# Altium PCB PCB1.PcbDoc (part 4 of 6)
Units mil, origin at the board's own origin, x right, y up, seen from the top; angles counter-clockwise.
Board outline 58000 x 19845 mil, 4 copper layers (Top Layer, MidLayer1, MidLayer2, Bottom Layer); 162 components, 222 nets, 4894 pads, 2245 vias.
Unrouted connection lines stored in the file: 192.
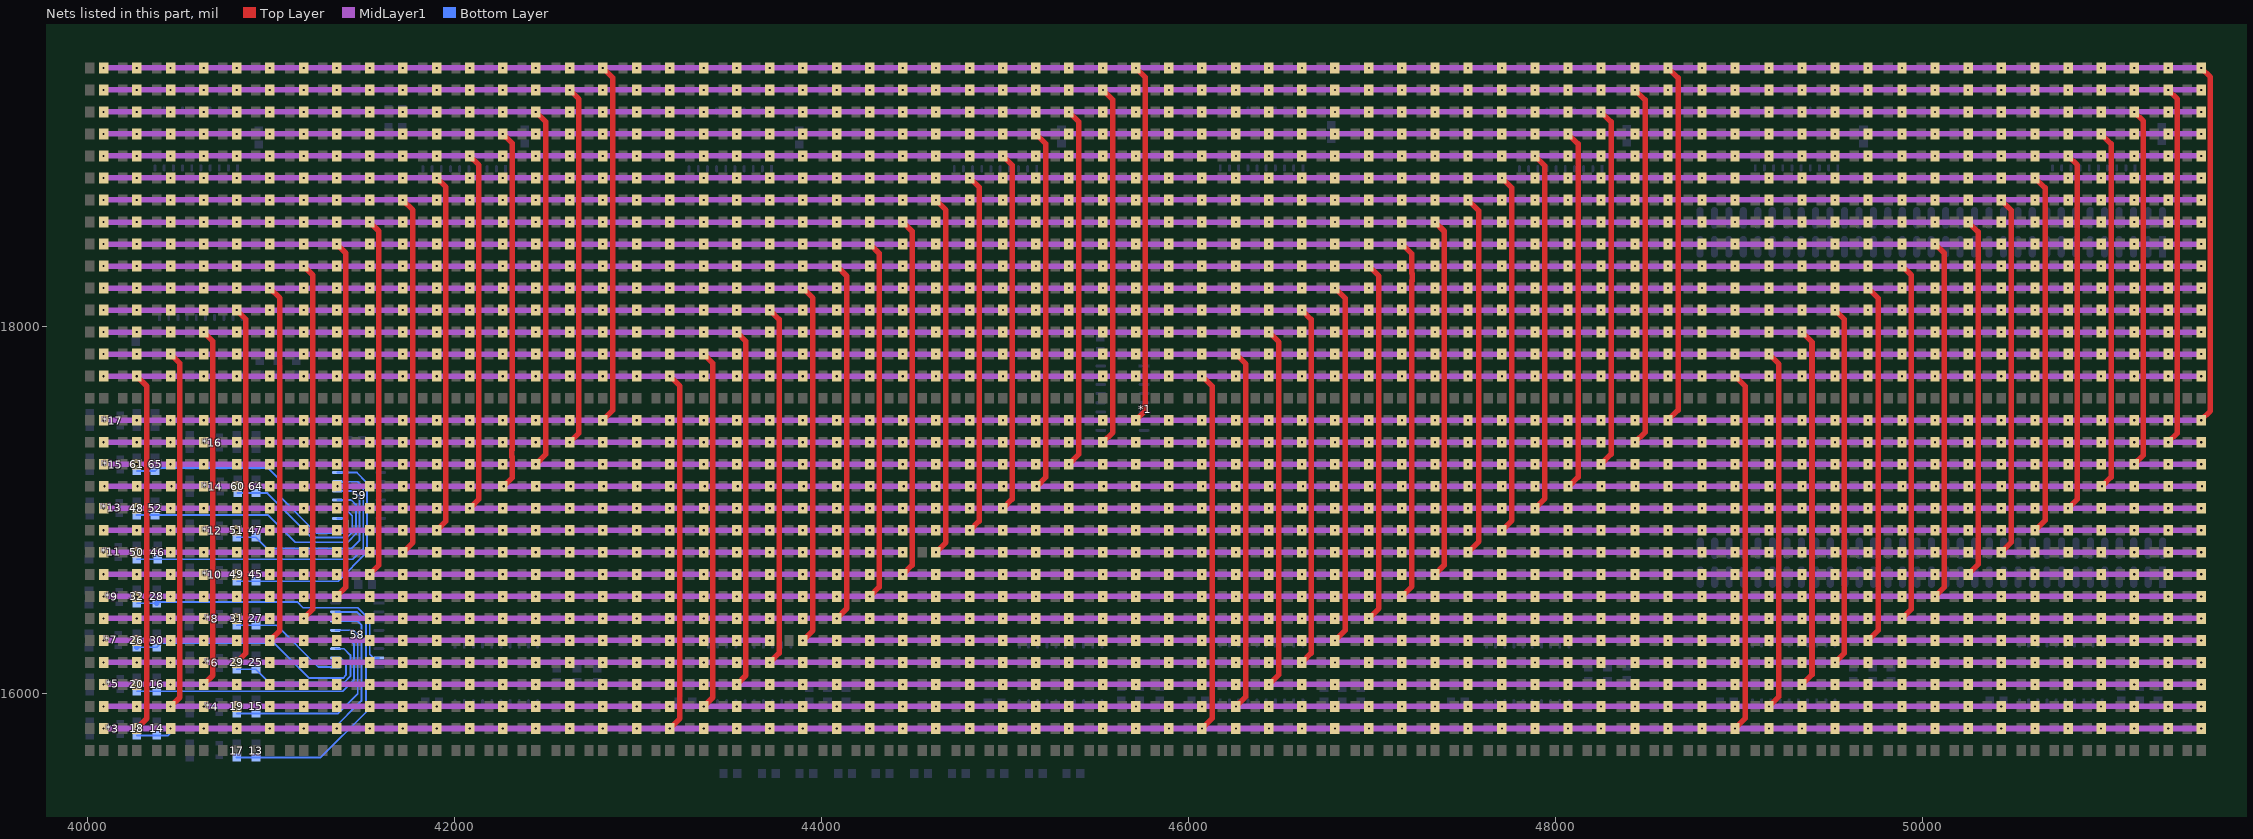
[diagram p6: the nets of this part, all layers, seen from the top]

## Via types
v1: diameter 20, hole 12, Top Layer to MidLayer1, 2032 vias
v2: diameter 20, hole 12, Top Layer to Bottom Layer, 143 vias
v3: diameter 20, hole 12, MidLayer2 to Bottom Layer, 70 vias

## Nets (pads, with @x,y where several pads share a name; then routed paths per layer and width w, separated by ;. In a path a pad name is that pad's centre, name@x,y a point inside that pad or via, vN(x,y) a via of type N, cw(c..) or ccw(c..) an arc to the next point about the centre after c; other vN are vias at no path point) (continued)
AOD1: *1.66 *3.1 | length 30722
  Top Layer w30: v1(40270.2,15810) 40325,15864.8 40325,17675.2 v1(40270.2,17730) ; v1(43175.2,15810) 43230,15864.8 43230,17675.2 v1(43175.2,17730) ; v1(46075.2,15810) 46130,15864.8 46130,17675.2 v1(46075.2,17730) ; v1(48980.2,15810) 49035,15864.8 49035,17675.2 v1(48980.2,17730)
  MidLayer1 w30: v2(40090,15810) v1(40270.2,15810) v1(40455.2,15810) v1(40635.2,15810) v1(40815,15810) v1(40995.2,15810) v1(41180.2,15810) v1(41360.2,15810) v1(41540,15810) v1(41720.2,15810) v1(41905.2,15810) v1(42085.2,15810) v1(42265,15810) v1(42445.2,15810) v1(42630.2,15810) v1(42810.2,15810) v1(42995,15810) v1(43175.2,15810) v1(43360.2,15810) v1(43540.2,15810) v1(43720,15810) v1(43900.2,15810) v1(44085.2,15810) v1(44265.2,15810) v1(44445,15810) v1(44625.2,15810) v1(44810.2,15810) v1(44990.2,15810) v1(45170,15810) v1(45350.2,15810) v1(45535.2,15810) v1(45715.2,15810) v1(45895,15810) v1(46075.2,15810) v1(46260.2,15810) v1(46440.2,15810) v1(46620,15810) v1(46800.2,15810) v1(46985.2,15810) v1(47165.2,15810) v1(47345,15810) v1(47525.2,15810) v1(47710.2,15810) v1(47890.2,15810) v1(48070,15810) v1(48250.2,15810) v1(48435.2,15810) v1(48615.2,15810) v1(48800,15810) v1(48980.2,15810) v1(49165.2,15810) v1(49345.2,15810) v1(49525,15810) v1(49705.2,15810) v1(49890.2,15810) v1(50070.2,15810) v1(50250,15810) v1(50430.2,15810) v1(50615.2,15810) v1(50795.2,15810) v1(50975,15810) v1(51155.2,15810) v1(51340.2,15810) v1(51520.2,15810) ; v1(40090,17730) v1(40270.2,17730) v1(40455.2,17730) v1(40635.2,17730) v1(40815,17730) v1(40995.2,17730) v1(41180.2,17730) v1(41360.2,17730) v1(41540,17730) v1(41720.2,17730) v1(41905.2,17730) v1(42085.2,17730) v1(42265,17730) v1(42445.2,17730) v1(42630.2,17730) v1(42810.2,17730) v1(42995,17730) v1(43175.2,17730) v1(43360.2,17730) v1(43540.2,17730) v1(43720,17730) v1(43900.2,17730) v1(44085.2,17730) v1(44265.2,17730) v1(44445,17730) v1(44625.2,17730) v1(44810.2,17730) v1(44990.2,17730) v1(45170,17730) v1(45350.2,17730) v1(45535.2,17730) v1(45715.2,17730) v1(45895,17730) v1(46075.2,17730) v1(46260.2,17730) v1(46440.2,17730) v1(46620,17730) v1(46800.2,17730) v1(46985.2,17730) v1(47165.2,17730) v1(47345,17730) v1(47525.2,17730) v1(47710.2,17730) v1(47890.2,17730) v1(48070,17730) v1(48250.2,17730) v1(48435.2,17730) v1(48615.2,17730) v1(48800,17730) v1(48980.2,17730) v1(49165.2,17730) v1(49345.2,17730) v1(49525,17730) v1(49705.2,17730) v1(49890.2,17730) v1(50070.2,17730) v1(50250,17730) v1(50430.2,17730) v1(50615.2,17730) v1(50795.2,17730) v1(50975,17730) v1(51155.2,17730) v1(51340.2,17730) v1(51520.2,17730)
AOD2: *1.67 *4.1 | length 30713.4
  Top Layer w30: v1(40455.2,15930) 40505.39,15980.2 40505.39,17799.8 v1(40455.2,17850) ; v1(43360.2,15930) 43410.39,15980.2 43410.39,17799.8 v1(43360.2,17850) ; v1(46260.2,15930) 46314.41,15984.21 46314.41,17795.79 v1(46260.2,17850) ; v1(49165.2,15930) 49219.41,15984.21 49219.41,17795.79 v1(49165.2,17850)
  MidLayer1 w30: v1(40090,15930) v1(40270.2,15930) v1(40455.2,15930) v2(40635.2,15930) v1(40815,15930) v1(40995.2,15930) v1(41180.2,15930) v1(41360.2,15930) v1(41540,15930) v1(41720.2,15930) v1(41905.2,15930) v1(42085.2,15930) v1(42265,15930) v1(42445.2,15930) v1(42630.2,15930) v1(42810.2,15930) v1(42995,15930) v1(43175.2,15930) v1(43360.2,15930) v1(43540.2,15930) v1(43720,15930) v1(43900.2,15930) v1(44085.2,15930) v1(44265.2,15930) v1(44445,15930) v1(44625.2,15930) v1(44810.2,15930) v1(44990.2,15930) v1(45170,15930) v1(45350.2,15930) v1(45535.2,15930) v1(45715.2,15930) v1(45895,15930) v1(46075.2,15930) v1(46260.2,15930) v1(46440.2,15930) v1(46620,15930) v1(46800.2,15930) v1(46985.2,15930) v1(47165.2,15930) v1(47345,15930) v1(47525.2,15930) v1(47710.2,15930) v1(47890.2,15930) v1(48070,15930) v1(48250.2,15930) v1(48435.2,15930) v1(48615.2,15930) v1(48800,15930) v1(48980.2,15930) v1(49165.2,15930) v1(49345.2,15930) v1(49525,15930) v1(49705.2,15930) v1(49890.2,15930) v1(50070.2,15930) v1(50250,15930) v1(50430.2,15930) v1(50615.2,15930) v1(50795.2,15930) v1(50975,15930) v1(51155.2,15930) v1(51340.2,15930) v1(51520.2,15930) ; v1(40090,17850) v1(40270.2,17850) v1(40455.2,17850) v1(40635.2,17850) v1(40815,17850) v1(40995.2,17850) v1(41180.2,17850) v1(41360.2,17850) v1(41540,17850) v1(41720.2,17850) v1(41905.2,17850) v1(42085.2,17850) v1(42265,17850) v1(42445.2,17850) v1(42630.2,17850) v1(42810.2,17850) v1(42995,17850) v1(43175.2,17850) v1(43360.2,17850) v1(43540.2,17850) v1(43720,17850) v1(43900.2,17850) v1(44085.2,17850) v1(44265.2,17850) v1(44445,17850) v1(44625.2,17850) v1(44810.2,17850) v1(44990.2,17850) v1(45170,17850) v1(45350.2,17850) v1(45535.2,17850) v1(45715.2,17850) v1(45895,17850) v1(46075.2,17850) v1(46260.2,17850) v1(46440.2,17850) v1(46620,17850) v1(46800.2,17850) v1(46985.2,17850) v1(47165.2,17850) v1(47345,17850) v1(47525.2,17850) v1(47710.2,17850) v1(47890.2,17850) v1(48070,17850) v1(48250.2,17850) v1(48435.2,17850) v1(48615.2,17850) v1(48800,17850) v1(48980.2,17850) v1(49165.2,17850) v1(49345.2,17850) v1(49525,17850) v1(49705.2,17850) v1(49890.2,17850) v1(50070.2,17850) v1(50250,17850) v1(50430.2,17850) v1(50615.2,17850) v1(50795.2,17850) v1(50975,17850) v1(51155.2,17850) v1(51340.2,17850) v1(51520.2,17850)
AOD3: *1.68 *5.1 | length 30713.4
  Top Layer w30: v1(40635.2,16050) 40685.39,16100.2 40685.39,17919.8 v1(40635.2,17970) ; v1(43540.2,16050) 43590.39,16100.2 43590.39,17919.8 v1(43540.2,17970) ; v1(46440.2,16050) 46494.41,16104.21 46494.41,17915.79 v1(46440.2,17970) ; v1(49345.2,16050) 49399.41,16104.21 49399.41,17915.79 v1(49345.2,17970)
  MidLayer1 w30: v2(40090,16050) v1(40270.2,16050) v1(40455.2,16050) v1(40635.2,16050) v1(40815,16050) v1(40995.2,16050) v1(41180.2,16050) v1(41360.2,16050) v1(41540,16050) v1(41720.2,16050) v1(41905.2,16050) v1(42085.2,16050) v1(42265,16050) v1(42445.2,16050) v1(42630.2,16050) v1(42810.2,16050) v1(42995,16050) v1(43175.2,16050) v1(43360.2,16050) v1(43540.2,16050) v1(43720,16050) v1(43900.2,16050) v1(44085.2,16050) v1(44265.2,16050) v1(44445,16050) v1(44625.2,16050) v1(44810.2,16050) v1(44990.2,16050) v1(45170,16050) v1(45350.2,16050) v1(45535.2,16050) v1(45715.2,16050) v1(45895,16050) v1(46075.2,16050) v1(46260.2,16050) v1(46440.2,16050) v1(46620,16050) v1(46800.2,16050) v1(46985.2,16050) v1(47165.2,16050) v1(47345,16050) v1(47525.2,16050) v1(47710.2,16050) v1(47890.2,16050) v1(48070,16050) v1(48250.2,16050) v1(48435.2,16050) v1(48615.2,16050) v1(48800,16050) v1(48980.2,16050) v1(49165.2,16050) v1(49345.2,16050) v1(49525,16050) v1(49705.2,16050) v1(49890.2,16050) v1(50070.2,16050) v1(50250,16050) v1(50430.2,16050) v1(50615.2,16050) v1(50795.2,16050) v1(50975,16050) v1(51155.2,16050) v1(51340.2,16050) v1(51520.2,16050) ; v1(40090,17970) v1(40270.2,17970) v1(40455.2,17970) v1(40635.2,17970) v1(40815,17970) v1(40995.2,17970) v1(41180.2,17970) v1(41360.2,17970) v1(41540,17970) v1(41720.2,17970) v1(41905.2,17970) v1(42085.2,17970) v1(42265,17970) v1(42445.2,17970) v1(42630.2,17970) v1(42810.2,17970) v1(42995,17970) v1(43175.2,17970) v1(43360.2,17970) v1(43540.2,17970) v1(43720,17970) v1(43900.2,17970) v1(44085.2,17970) v1(44265.2,17970) v1(44445,17970) v1(44625.2,17970) v1(44810.2,17970) v1(44990.2,17970) v1(45170,17970) v1(45350.2,17970) v1(45535.2,17970) v1(45715.2,17970) v1(45895,17970) v1(46075.2,17970) v1(46260.2,17970) v1(46440.2,17970) v1(46620,17970) v1(46800.2,17970) v1(46985.2,17970) v1(47165.2,17970) v1(47345,17970) v1(47525.2,17970) v1(47710.2,17970) v1(47890.2,17970) v1(48070,17970) v1(48250.2,17970) v1(48435.2,17970) v1(48615.2,17970) v1(48800,17970) v1(48980.2,17970) v1(49165.2,17970) v1(49345.2,17970) v1(49525,17970) v1(49705.2,17970) v1(49890.2,17970) v1(50070.2,17970) v1(50250,17970) v1(50430.2,17970) v1(50615.2,17970) v1(50795.2,17970) v1(50975,17970) v1(51155.2,17970) v1(51340.2,17970) v1(51520.2,17970)
AOD4: *1.69 *6.1 | length 30707.4
  Top Layer w30: v1(40815,16170) 40865.39,16220.39 40865.39,18039.61 v1(40815,18090) ; v1(43720,16170) 43770.39,16220.39 43770.39,18039.61 v1(43720,18090) ; v1(46620,16170) 46670.39,16220.39 46670.39,18039.61 v1(46620,18090) ; v1(49525,16170) 49575.39,16220.39 49575.39,18039.61 v1(49525,18090)
  MidLayer1 w30: v1(40090,16170) v1(40270.2,16170) v1(40455.2,16170) v2(40635.2,16170) v1(40815,16170) v1(40995.2,16170) v1(41180.2,16170) v1(41360.2,16170) v1(41540,16170) v1(41720.2,16170) v1(41905.2,16170) v1(42085.2,16170) v1(42265,16170) v1(42445.2,16170) v1(42630.2,16170) v1(42810.2,16170) v1(42995,16170) v1(43175.2,16170) v1(43360.2,16170) v1(43540.2,16170) v1(43720,16170) v1(43900.2,16170) v1(44085.2,16170) v1(44265.2,16170) v1(44445,16170) v1(44625.2,16170) v1(44810.2,16170) v1(44990.2,16170) v1(45170,16170) v1(45350.2,16170) v1(45535.2,16170) v1(45715.2,16170) v1(45895,16170) v1(46075.2,16170) v1(46260.2,16170) v1(46440.2,16170) v1(46620,16170) v1(46800.2,16170) v1(46985.2,16170) v1(47165.2,16170) v1(47345,16170) v1(47525.2,16170) v1(47710.2,16170) v1(47890.2,16170) v1(48070,16170) v1(48250.2,16170) v1(48435.2,16170) v1(48615.2,16170) v1(48800,16170) v1(48980.2,16170) v1(49165.2,16170) v1(49345.2,16170) v1(49525,16170) v1(49705.2,16170) v1(49890.2,16170) v1(50070.2,16170) v1(50250,16170) v1(50430.2,16170) v1(50615.2,16170) v1(50795.2,16170) v1(50975,16170) v1(51155.2,16170) v1(51340.2,16170) v1(51520.2,16170) ; v1(40090,18090) v1(40270.2,18090) v1(40455.2,18090) v1(40635.2,18090) v1(40815,18090) v1(40995.2,18090) v1(41180.2,18090) v1(41360.2,18090) v1(41540,18090) v1(41720.2,18090) v1(41905.2,18090) v1(42085.2,18090) v1(42265,18090) v1(42445.2,18090) v1(42630.2,18090) v1(42810.2,18090) v1(42995,18090) v1(43175.2,18090) v1(43360.2,18090) v1(43540.2,18090) v1(43720,18090) v1(43900.2,18090) v1(44085.2,18090) v1(44265.2,18090) v1(44445,18090) v1(44625.2,18090) v1(44810.2,18090) v1(44990.2,18090) v1(45170,18090) v1(45350.2,18090) v1(45535.2,18090) v1(45715.2,18090) v1(45895,18090) v1(46075.2,18090) v1(46260.2,18090) v1(46440.2,18090) v1(46620,18090) v1(46800.2,18090) v1(46985.2,18090) v1(47165.2,18090) v1(47345,18090) v1(47525.2,18090) v1(47710.2,18090) v1(47890.2,18090) v1(48070,18090) v1(48250.2,18090) v1(48435.2,18090) v1(48615.2,18090) v1(48800,18090) v1(48980.2,18090) v1(49165.2,18090) v1(49345.2,18090) v1(49525,18090) v1(49705.2,18090) v1(49890.2,18090) v1(50070.2,18090) v1(50250,18090) v1(50430.2,18090) v1(50615.2,18090) v1(50795.2,18090) v1(50975,18090) v1(51155.2,18090) v1(51340.2,18090) v1(51520.2,18090)
AOD5: *1.70 *7.1 | length 30542.4
  Top Layer w30: v1(40995.2,16290) 41050,16344.8 41050,18154.8 *1.70@40994.8,18210 v1(40995.2,18210) ; v1(43900.2,16290) 43955,16344.8 43955,18155.2 v1(43900.2,18210) ; v1(46800.2,16290) 46855,16344.8 46855,18155.2 v1(46800.2,18210) ; v1(49705.2,16290) 49760,16344.8 49760,18155.2 v1(49705.2,18210)
  MidLayer1 w30: v2(40090,16290) v1(40270.2,16290) v1(40455.2,16290) v1(40635.2,16290) v1(40815,16290) v1(40995.2,16290) v1(41180.2,16290) v1(41360.2,16290) v1(41540,16290) v1(41720.2,16290) v1(41905.2,16290) v1(42085.2,16290) v1(42265,16290) v1(42445.2,16290) v1(42630.2,16290) v1(42810.2,16290) v1(42995,16290) v1(43175.2,16290) v1(43360.2,16290) v1(43540.2,16290) v1(43720,16290) ; v1(40090,18210) v1(40270.2,18210) v1(40455.2,18210) v1(40635.2,18210) v1(40815,18210) v1(40995.2,18210) v1(41180.2,18210) v1(41360.2,18210) v1(41540,18210) v1(41720.2,18210) v1(41905.2,18210) v1(42085.2,18210) v1(42265,18210) v1(42445.2,18210) v1(42630.2,18210) v1(42810.2,18210) v1(42995,18210) v1(43175.2,18210) v1(43360.2,18210) v1(43540.2,18210) v1(43720,18210) v1(43900.2,18210) v1(44085.2,18210) v1(44265.2,18210) v1(44445,18210) v1(44625.2,18210) v1(44810.2,18210) v1(44990.2,18210) v1(45170,18210) v1(45350.2,18210) v1(45535.2,18210) v1(45715.2,18210) v1(45895,18210) v1(46075.2,18210) v1(46260.2,18210) v1(46440.2,18210) v1(46620,18210) v1(46800.2,18210) v1(46985.2,18210) v1(47165.2,18210) v1(47345,18210) v1(47525.2,18210) v1(47710.2,18210) v1(47890.2,18210) v1(48070,18210) v1(48250.2,18210) v1(48435.2,18210) v1(48615.2,18210) v1(48800,18210) v1(48980.2,18210) v1(49165.2,18210) v1(49345.2,18210) v1(49525,18210) v1(49705.2,18210) v1(49890.2,18210) v1(50070.2,18210) v1(50250,18210) v1(50430.2,18210) v1(50615.2,18210) v1(50795.2,18210) v1(50975,18210) v1(51155.2,18210) v1(51340.2,18210) v1(51520.2,18210) ; v1(43900.2,16290) v1(44085.2,16290) v1(44265.2,16290) v1(44445,16290) v1(44625.2,16290) v1(44810.2,16290) v1(44990.2,16290) v1(45170,16290) v1(45350.2,16290) v1(45535.2,16290) v1(45715.2,16290) v1(45895,16290) v1(46075.2,16290) v1(46260.2,16290) v1(46440.2,16290) v1(46620,16290) v1(46800.2,16290) v1(46985.2,16290) v1(47165.2,16290) v1(47345,16290) v1(47525.2,16290) v1(47710.2,16290) v1(47890.2,16290) v1(48070,16290) v1(48250.2,16290) v1(48435.2,16290) v1(48615.2,16290) v1(48800,16290) v1(48980.2,16290) v1(49165.2,16290) v1(49345.2,16290) v1(49525,16290) v1(49705.2,16290) v1(49890.2,16290) v1(50070.2,16290) v1(50250,16290) v1(50430.2,16290) v1(50615.2,16290) v1(50795.2,16290) v1(50975,16290) v1(51155.2,16290) v1(51340.2,16290) v1(51520.2,16290)
AOD6: *1.71 *8.1 | length 30713.4
  Top Layer w30: v1(41180.2,16410) 41230.39,16460.2 41230.39,18279.8 v1(41180.2,18330) ; v1(44085.2,16410) 44139.41,16464.21 44139.41,18275.79 v1(44085.2,18330) ; v1(46985.2,16410) 47039.41,16464.21 47039.41,18275.79 v1(46985.2,18330) ; v1(49890.2,16410) 49940.39,16460.2 49940.39,18279.8 v1(49890.2,18330)
  MidLayer1 w30: v1(40090,16410) v1(40270.2,16410) v1(40455.2,16410) v2(40635.2,16410) v1(40815,16410) v1(40995.2,16410) v1(41180.2,16410) v1(41360.2,16410) v1(41540,16410) v1(41720.2,16410) v1(41905.2,16410) v1(42085.2,16410) v1(42265,16410) v1(42445.2,16410) v1(42630.2,16410) v1(42810.2,16410) v1(42995,16410) v1(43175.2,16410) v1(43360.2,16410) v1(43540.2,16410) v1(43720,16410) v1(43900.2,16410) v1(44085.2,16410) v1(44265.2,16410) v1(44445,16410) v1(44625.2,16410) v1(44810.2,16410) v1(44990.2,16410) v1(45170,16410) v1(45350.2,16410) v1(45535.2,16410) v1(45715.2,16410) v1(45895,16410) v1(46075.2,16410) v1(46260.2,16410) v1(46440.2,16410) v1(46620,16410) v1(46800.2,16410) v1(46985.2,16410) v1(47165.2,16410) v1(47345,16410) v1(47525.2,16410) v1(47710.2,16410) v1(47890.2,16410) v1(48070,16410) v1(48250.2,16410) v1(48435.2,16410) v1(48615.2,16410) v1(48800,16410) v1(48980.2,16410) v1(49165.2,16410) v1(49345.2,16410) v1(49525,16410) v1(49705.2,16410) v1(49890.2,16410) v1(50070.2,16410) v1(50250,16410) v1(50430.2,16410) v1(50615.2,16410) v1(50795.2,16410) v1(50975,16410) v1(51155.2,16410) v1(51340.2,16410) v1(51520.2,16410) ; v1(40090,18330) v1(40270.2,18330) v1(40455.2,18330) v1(40635.2,18330) v1(40815,18330) v1(40995.2,18330) v1(41180.2,18330) v1(41360.2,18330) v1(41540,18330) v1(41720.2,18330) v1(41905.2,18330) v1(42085.2,18330) v1(42265,18330) v1(42445.2,18330) v1(42630.2,18330) v1(42810.2,18330) v1(42995,18330) v1(43175.2,18330) v1(43360.2,18330) v1(43540.2,18330) v1(43720,18330) v1(43900.2,18330) v1(44085.2,18330) v1(44265.2,18330) v1(44445,18330) v1(44625.2,18330) v1(44810.2,18330) v1(44990.2,18330) v1(45170,18330) v1(45350.2,18330) v1(45535.2,18330) v1(45715.2,18330) v1(45895,18330) v1(46075.2,18330) v1(46260.2,18330) v1(46440.2,18330) v1(46620,18330) v1(46800.2,18330) v1(46985.2,18330) v1(47165.2,18330) v1(47345,18330) v1(47525.2,18330) v1(47710.2,18330) v1(47890.2,18330) v1(48070,18330) v1(48250.2,18330) v1(48435.2,18330) v1(48615.2,18330) v1(48800,18330) v1(48980.2,18330) v1(49165.2,18330) v1(49345.2,18330) v1(49525,18330) v1(49705.2,18330) v1(49890.2,18330) v1(50070.2,18330) v1(50250,18330) v1(50430.2,18330) v1(50615.2,18330) v1(50795.2,18330) v1(50975,18330) v1(51155.2,18330) v1(51340.2,18330) v1(51520.2,18330)
AOD7: *1.72 *9.1 | length 30710.5
  Top Layer w30: v1(41360.2,16530) 41410.39,16580.2 41410.39,18399.8 v1(41360.2,18450) ; v1(44265.2,16530) 44315.39,16580.2 44315.39,18399.8 v1(44265.2,18450) ; v1(47165.2,16530) 47219.41,16584.21 47219.41,18249.88 47220,18250.47 47220,18288.94 47219.41,18289.53 47219.41,18395.79 v1(47165.2,18450) ; v1(50070.2,16530) 50120.39,16580.2 50120.39,18399.8 v1(50070.2,18450)
  MidLayer1 w30: v2(40090,16530) v1(40270.2,16530) v1(40455.2,16530) v1(40635.2,16530) v1(40815,16530) v1(40995.2,16530) v1(41180.2,16530) v1(41360.2,16530) v1(41540,16530) v1(41720.2,16530) v1(41905.2,16530) v1(42085.2,16530) v1(42265,16530) v1(42445.2,16530) v1(42630.2,16530) v1(42810.2,16530) v1(42995,16530) v1(43175.2,16530) v1(43360.2,16530) v1(43540.2,16530) v1(43720,16530) v1(43900.2,16530) v1(44085.2,16530) v1(44265.2,16530) v1(44445,16530) v1(44625.2,16530) v1(44810.2,16530) v1(44990.2,16530) v1(45170,16530) v1(45350.2,16530) v1(45535.2,16530) v1(45715.2,16530) v1(45895,16530) v1(46075.2,16530) v1(46260.2,16530) v1(46440.2,16530) v1(46620,16530) v1(46800.2,16530) v1(46985.2,16530) v1(47165.2,16530) v1(47345,16530) v1(47525.2,16530) v1(47710.2,16530) v1(47890.2,16530) v1(48070,16530) v1(48250.2,16530) v1(48435.2,16530) v1(48615.2,16530) v1(48800,16530) v1(48980.2,16530) v1(49165.2,16530) v1(49345.2,16530) v1(49525,16530) v1(49705.2,16530) v1(49890.2,16530) v1(50070.2,16530) v1(50250,16530) v1(50430.2,16530) v1(50615.2,16530) v1(50795.2,16530) v1(50975,16530) v1(51155.2,16530) v1(51340.2,16530) v1(51520.2,16530) ; v1(40090,18450) v1(40270.2,18450) v1(40455.2,18450) v1(40635.2,18450) v1(40815,18450) v1(40995.2,18450) v1(41180.2,18450) v1(41360.2,18450) v1(41540,18450) v1(41720.2,18450) v1(41905.2,18450) v1(42085.2,18450) v1(42265,18450) v1(42445.2,18450) v1(42630.2,18450) v1(42810.2,18450) v1(42995,18450) v1(43175.2,18450) v1(43360.2,18450) v1(43540.2,18450) v1(43720,18450) v1(43900.2,18450) v1(44085.2,18450) v1(44265.2,18450) v1(44445,18450) v1(44625.2,18450) v1(44810.2,18450) v1(44990.2,18450) v1(45170,18450) v1(45350.2,18450) v1(45535.2,18450) v1(45715.2,18450) v1(45895,18450) v1(46075.2,18450) v1(46260.2,18450) v1(46440.2,18450) v1(46620,18450) v1(46800.2,18450) v1(46985.2,18450) v1(47165.2,18450) v1(47345,18450) v1(47525.2,18450) v1(47710.2,18450) v1(47890.2,18450) v1(48070,18450) v1(48250.2,18450) v1(48435.2,18450) v1(48615.2,18450) v1(48800,18450) v1(48980.2,18450) v1(49165.2,18450) v1(49345.2,18450) v1(49525,18450) v1(49705.2,18450) v1(49890.2,18450) v1(50070.2,18450) v1(50250,18450) v1(50430.2,18450) v1(50615.2,18450) v1(50795.2,18450) v1(50975,18450) v1(51155.2,18450) v1(51340.2,18450) v1(51520.2,18450)
AOD8: *1.73 *10.1 | length 30710.7
  Top Layer w30: v1(41540,16650) 41590.39,16700.39 41590.39,18519.61 v1(41540,18570) ; v1(44445,16650) 44495.39,16700.39 44495.39,18519.61 v1(44445,18570) ; v1(47345,16650) 47395.39,16700.39 47395.39,18519.61 v1(47345,18570) ; v1(50250,16650) 50304.41,16704.41 50304.41,18515.59 v1(50250,18570)
  MidLayer1 w30: v1(40090,16650) v1(40270.2,16650) v1(40455.2,16650) v2(40635.2,16650) v1(40815,16650) v1(40995.2,16650) v1(41180.2,16650) v1(41360.2,16650) v1(41540,16650) v1(41720.2,16650) v1(41905.2,16650) v1(42085.2,16650) v1(42265,16650) v1(42445.2,16650) v1(42630.2,16650) v1(42810.2,16650) v1(42995,16650) v1(43175.2,16650) v1(43360.2,16650) v1(43540.2,16650) v1(43720,16650) v1(43900.2,16650) v1(44085.2,16650) v1(44265.2,16650) v1(44445,16650) v1(44625.2,16650) v1(44810.2,16650) v1(44990.2,16650) v1(45170,16650) v1(45350.2,16650) v1(45535.2,16650) v1(45715.2,16650) v1(45895,16650) v1(46075.2,16650) v1(46260.2,16650) v1(46440.2,16650) v1(46620,16650) v1(46800.2,16650) v1(46985.2,16650) v1(47165.2,16650) v1(47345,16650) v1(47525.2,16650) v1(47710.2,16650) v1(47890.2,16650) v1(48070,16650) v1(48250.2,16650) v1(48435.2,16650) v1(48615.2,16650) v1(48800,16650) v1(48980.2,16650) v1(49165.2,16650) v1(49345.2,16650) v1(49525,16650) v1(49705.2,16650) v1(49890.2,16650) v1(50070.2,16650) v1(50250,16650) v1(50430.2,16650) v1(50615.2,16650) v1(50795.2,16650) v1(50975,16650) v1(51155.2,16650) v1(51340.2,16650) v1(51520.2,16650) ; v1(40090,18570) v1(40270.2,18570) v1(40455.2,18570) v1(40635.2,18570) v1(40815,18570) v1(40995.2,18570) v1(41180.2,18570) v1(41360.2,18570) v1(41540,18570) v1(41720.2,18570) v1(41905.2,18570) v1(42085.2,18570) v1(42265,18570) v1(42445.2,18570) v1(42630.2,18570) v1(42810.2,18570) v1(42995,18570) v1(43175.2,18570) v1(43360.2,18570) v1(43540.2,18570) v1(43720,18570) v1(43900.2,18570) v1(44085.2,18570) v1(44265.2,18570) v1(44445,18570) v1(44625.2,18570) v1(44810.2,18570) v1(44990.2,18570) v1(45170,18570) v1(45350.2,18570) v1(45535.2,18570) v1(45715.2,18570) v1(45895,18570) v1(46075.2,18570) v1(46260.2,18570) v1(46440.2,18570) v1(46620,18570) v1(46800.2,18570) v1(46985.2,18570) v1(47165.2,18570) v1(47345,18570) v1(47525.2,18570) v1(47710.2,18570) v1(47890.2,18570) v1(48070,18570) v1(48250.2,18570) v1(48435.2,18570) v1(48615.2,18570) v1(48800,18570) v1(48980.2,18570) v1(49165.2,18570) v1(49345.2,18570) v1(49525,18570) v1(49705.2,18570) v1(49890.2,18570) v1(50070.2,18570) v1(50250,18570) v1(50430.2,18570) v1(50615.2,18570) v1(50795.2,18570) v1(50975,18570) v1(51155.2,18570) v1(51340.2,18570) v1(51520.2,18570)
AOD9: *1.74 *11.1 | length 30546
  Top Layer w30: v1(41720.2,16770) 41775,16824.8 41775,18634.8 *1.74@41719.8,18690 v1(41720.2,18690) ; v1(44625.2,16770) 44680,16824.8 44680,18635.2 v1(44625.2,18690) ; v1(47525.2,16770) 47584.41,16829.21 47584.41,18630.79 v1(47525.2,18690) ; v1(50430.2,16770) 50485,16824.8 50485,18635.2 v1(50430.2,18690)
  MidLayer1 w30: v2(40090,16770) v1(40270.2,16770) v1(40455.2,16770) v1(40635.2,16770) v1(40815,16770) v1(40995.2,16770) v1(41180.2,16770) v1(41360.2,16770) v1(41540,16770) v1(41720.2,16770) v1(41905.2,16770) v1(42085.2,16770) v1(42265,16770) v1(42445.2,16770) v1(42630.2,16770) v1(42810.2,16770) v1(42995,16770) v1(43175.2,16770) v1(43360.2,16770) v1(43540.2,16770) v1(43720,16770) v1(43900.2,16770) v1(44085.2,16770) v1(44265.2,16770) v1(44445,16770) ; v1(40090,18690) v1(40270.2,18690) v1(40455.2,18690) v1(40635.2,18690) v1(40815,18690) v1(40995.2,18690) v1(41180.2,18690) v1(41360.2,18690) v1(41540,18690) v1(41720.2,18690) v1(41905.2,18690) v1(42085.2,18690) v1(42265,18690) v1(42445.2,18690) v1(42630.2,18690) v1(42810.2,18690) v1(42995,18690) v1(43175.2,18690) v1(43360.2,18690) v1(43540.2,18690) v1(43720,18690) v1(43900.2,18690) v1(44085.2,18690) v1(44265.2,18690) v1(44445,18690) v1(44625.2,18690) v1(44810.2,18690) v1(44990.2,18690) v1(45170,18690) v1(45350.2,18690) v1(45535.2,18690) v1(45715.2,18690) v1(45895,18690) v1(46075.2,18690) v1(46260.2,18690) v1(46440.2,18690) v1(46620,18690) v1(46800.2,18690) v1(46985.2,18690) v1(47165.2,18690) v1(47345,18690) v1(47525.2,18690) v1(47710.2,18690) v1(47890.2,18690) v1(48070,18690) v1(48250.2,18690) v1(48435.2,18690) v1(48615.2,18690) v1(48800,18690) v1(48980.2,18690) v1(49165.2,18690) v1(49345.2,18690) v1(49525,18690) v1(49705.2,18690) v1(49890.2,18690) v1(50070.2,18690) v1(50250,18690) v1(50430.2,18690) v1(50615.2,18690) v1(50795.2,18690) v1(50975,18690) v1(51155.2,18690) v1(51340.2,18690) v1(51520.2,18690) ; v1(44625.2,16770) v1(44810.2,16770) v1(44990.2,16770) v1(45170,16770) v1(45350.2,16770) v1(45535.2,16770) v1(45715.2,16770) v1(45895,16770) v1(46075.2,16770) v1(46260.2,16770) v1(46440.2,16770) v1(46620,16770) v1(46800.2,16770) v1(46985.2,16770) v1(47165.2,16770) v1(47345,16770) v1(47525.2,16770) v1(47710.2,16770) v1(47890.2,16770) v1(48070,16770) v1(48250.2,16770) v1(48435.2,16770) v1(48615.2,16770) v1(48800,16770) v1(48980.2,16770) v1(49165.2,16770) v1(49345.2,16770) v1(49525,16770) v1(49705.2,16770) v1(49890.2,16770) v1(50070.2,16770) v1(50250,16770) v1(50430.2,16770) v1(50615.2,16770) v1(50795.2,16770) v1(50975,16770) v1(51155.2,16770) v1(51340.2,16770) v1(51520.2,16770)
AOD10: *1.75 *12.1 | length 30713.4
  Top Layer w30: v1(41905.2,16890) 41955.39,16940.2 41955.39,18759.8 v1(41905.2,18810) ; v1(44810.2,16890) 44860.39,16940.2 44860.39,18759.8 v1(44810.2,18810) ; v1(47710.2,16890) 47764.41,16944.21 47764.41,18755.79 v1(47710.2,18810) ; v1(50615.2,16890) 50669.41,16944.21 50669.41,18755.79 v1(50615.2,18810)
  MidLayer1 w30: v1(40090,16890) v1(40270.2,16890) v1(40455.2,16890) v2(40635.2,16890) v1(40815,16890) v1(40995.2,16890) v1(41180.2,16890) v1(41360.2,16890) v1(41540,16890) v1(41720.2,16890) v1(41905.2,16890) v1(42085.2,16890) v1(42265,16890) v1(42445.2,16890) v1(42630.2,16890) v1(42810.2,16890) v1(42995,16890) v1(43175.2,16890) v1(43360.2,16890) v1(43540.2,16890) v1(43720,16890) v1(43900.2,16890) v1(44085.2,16890) v1(44265.2,16890) v1(44445,16890) v1(44625.2,16890) v1(44810.2,16890) v1(44990.2,16890) v1(45170,16890) v1(45350.2,16890) v1(45535.2,16890) v1(45715.2,16890) v1(45895,16890) v1(46075.2,16890) v1(46260.2,16890) v1(46440.2,16890) v1(46620,16890) v1(46800.2,16890) v1(46985.2,16890) v1(47165.2,16890) v1(47345,16890) v1(47525.2,16890) v1(47710.2,16890) v1(47890.2,16890) v1(48070,16890) v1(48250.2,16890) v1(48435.2,16890) v1(48615.2,16890) v1(48800,16890) v1(48980.2,16890) v1(49165.2,16890) v1(49345.2,16890) v1(49525,16890) v1(49705.2,16890) v1(49890.2,16890) v1(50070.2,16890) v1(50250,16890) v1(50430.2,16890) v1(50615.2,16890) v1(50795.2,16890) v1(50975,16890) v1(51155.2,16890) v1(51340.2,16890) v1(51520.2,16890) ; v1(40090,18810) v1(40270.2,18810) v1(40455.2,18810) v1(40635.2,18810) v1(40815,18810) v1(40995.2,18810) v1(41180.2,18810) v1(41360.2,18810) v1(41540,18810) v1(41720.2,18810) v1(41905.2,18810) v1(42085.2,18810) v1(42265,18810) v1(42445.2,18810) v1(42630.2,18810) v1(42810.2,18810) v1(42995,18810) v1(43175.2,18810) v1(43360.2,18810) v1(43540.2,18810) v1(43720,18810) v1(43900.2,18810) v1(44085.2,18810) v1(44265.2,18810) v1(44445,18810) v1(44625.2,18810) v1(44810.2,18810) v1(44990.2,18810) v1(45170,18810) v1(45350.2,18810) v1(45535.2,18810) v1(45715.2,18810) v1(45895,18810) v1(46075.2,18810) v1(46260.2,18810) v1(46440.2,18810) v1(46620,18810) v1(46800.2,18810) v1(46985.2,18810) v1(47165.2,18810) v1(47345,18810) v1(47525.2,18810) v1(47710.2,18810) v1(47890.2,18810) v1(48070,18810) v1(48250.2,18810) v1(48435.2,18810) v1(48615.2,18810) v1(48800,18810) v1(48980.2,18810) v1(49165.2,18810) v1(49345.2,18810) v1(49525,18810) v1(49705.2,18810) v1(49890.2,18810) v1(50070.2,18810) v1(50250,18810) v1(50430.2,18810) v1(50615.2,18810) v1(50795.2,18810) v1(50975,18810) v1(51155.2,18810) v1(51340.2,18810) v1(51520.2,18810)
AOD11: *1.76 *13.1 | length 30710.4
  Top Layer w30: v1(42085.2,17010) 42135.39,17060.2 42135.39,18729.88 42135,18730.28 42135,18769.33 42135.39,18769.72 42135.39,18879.8 v1(42085.2,18930) ; v1(44990.2,17010) 45040.39,17060.2 45040.39,18879.8 v1(44990.2,18930) ; v1(47890.2,17010) 47944.41,17064.21 47944.41,18875.79 v1(47890.2,18930) ; v1(50795.2,17010) 50845.39,17060.2 50845.39,18879.8 v1(50795.2,18930)
  MidLayer1 w30: v2(40090,17010) v1(40270.2,17010) v1(40455.2,17010) v1(40635.2,17010) v1(40815,17010) v1(40995.2,17010) v1(41180.2,17010) v1(41360.2,17010) v1(41540,17010) v1(41720.2,17010) v1(41905.2,17010) v1(42085.2,17010) v1(42265,17010) v1(42445.2,17010) v1(42630.2,17010) v1(42810.2,17010) v1(42995,17010) v1(43175.2,17010) v1(43360.2,17010) v1(43540.2,17010) v1(43720,17010) v1(43900.2,17010) v1(44085.2,17010) v1(44265.2,17010) v1(44445,17010) v1(44625.2,17010) v1(44810.2,17010) v1(44990.2,17010) v1(45170,17010) v1(45350.2,17010) v1(45535.2,17010) v1(45715.2,17010) v1(45895,17010) v1(46075.2,17010) v1(46260.2,17010) v1(46440.2,17010) v1(46620,17010) v1(46800.2,17010) v1(46985.2,17010) v1(47165.2,17010) v1(47345,17010) v1(47525.2,17010) v1(47710.2,17010) v1(47890.2,17010) v1(48070,17010) v1(48250.2,17010) v1(48435.2,17010) v1(48615.2,17010) v1(48800,17010) v1(48980.2,17010) v1(49165.2,17010) v1(49345.2,17010) v1(49525,17010) v1(49705.2,17010) v1(49890.2,17010) v1(50070.2,17010) v1(50250,17010) v1(50430.2,17010) v1(50615.2,17010) v1(50795.2,17010) v1(50975,17010) v1(51155.2,17010) v1(51340.2,17010) v1(51520.2,17010) ; v1(40090,18930) v1(40270.2,18930) v1(40455.2,18930) v1(40635.2,18930) v1(40815,18930) v1(40995.2,18930) v1(41180.2,18930) v1(41360.2,18930) v1(41540,18930) v1(41720.2,18930) v1(41905.2,18930) v1(42085.2,18930) v1(42265,18930) v1(42445.2,18930) v1(42630.2,18930) v1(42810.2,18930) v1(42995,18930) v1(43175.2,18930) v1(43360.2,18930) v1(43540.2,18930) v1(43720,18930) v1(43900.2,18930) v1(44085.2,18930) v1(44265.2,18930) v1(44445,18930) v1(44625.2,18930) v1(44810.2,18930) v1(44990.2,18930) v1(45170,18930) v1(45350.2,18930) v1(45535.2,18930) v1(45715.2,18930) v1(45895,18930) v1(46075.2,18930) v1(46260.2,18930) v1(46440.2,18930) v1(46620,18930) v1(46800.2,18930) v1(46985.2,18930) v1(47165.2,18930) v1(47345,18930) v1(47525.2,18930) v1(47710.2,18930) v1(47890.2,18930) v1(48070,18930) v1(48250.2,18930) v1(48435.2,18930) v1(48615.2,18930) v1(48800,18930) v1(48980.2,18930) v1(49165.2,18930) v1(49345.2,18930) v1(49525,18930) v1(49705.2,18930) v1(49890.2,18930) v1(50070.2,18930) v1(50250,18930) v1(50430.2,18930) v1(50615.2,18930) v1(50795.2,18930) v1(50975,18930) v1(51155.2,18930) v1(51340.2,18930) v1(51520.2,18930)
AOD12: *1.77 *14.1 | length 30709.4
  Top Layer w30: v1(42265,19050) 42315.39,18999.61 42315.39,17330.12 42315,17329.72 42315,17290.67 42315.39,17290.28 42315.39,17175.39 v1(42270,17130) ; v1(45170,19050) 45224.41,18995.59 45224.41,17179.41 v1(45175,17130) ; v1(48070,19050) 48124.41,18995.59 48124.41,17179.41 v1(48075,17130) ; v1(50975,19050) 51029.41,18995.59 51029.41,17179.41 v1(50980,17130)
  MidLayer1 w30: v1(40090,19050) v1(40270.2,19050) v1(40455.2,19050) v1(40635.2,19050) v1(40815,19050) v1(40995.2,19050) v1(41180.2,19050) v1(41360.2,19050) v1(41540,19050) v1(41720.2,19050) v1(41905.2,19050) v1(42085.2,19050) v1(42265,19050) v1(42445.2,19050) v1(42630.2,19050) v1(42810.2,19050) v1(42995,19050) v1(43175.2,19050) v1(43360.2,19050) v1(43540.2,19050) v1(43720,19050) v1(43900.2,19050) v1(44085.2,19050) v1(44265.2,19050) v1(44445,19050) v1(44625.2,19050) v1(44810.2,19050) v1(44990.2,19050) v1(45170,19050) v1(45350.2,19050) v1(45535.2,19050) v1(45715.2,19050) v1(45895,19050) v1(46075.2,19050) v1(46260.2,19050) v1(46440.2,19050) v1(46620,19050) v1(46800.2,19050) v1(46985.2,19050) v1(47165.2,19050) v1(47345,19050) v1(47525.2,19050) v1(47710.2,19050) v1(47890.2,19050) v1(48070,19050) v1(48250.2,19050) v1(48435.2,19050) v1(48615.2,19050) v1(48800,19050) v1(48980.2,19050) v1(49165.2,19050) v1(49345.2,19050) v1(49525,19050) v1(49705.2,19050) v1(49890.2,19050) v1(50070.2,19050) v1(50250,19050) v1(50430.2,19050) v1(50615.2,19050) v1(50795.2,19050) v1(50975,19050) v1(51155.2,19050) v1(51340.2,19050) v1(51520.2,19050) ; v1(40095,17130) v1(40275.2,17130) v1(40460.2,17130) v2(40640.2,17130) v1(40820,17130) v1(41000.2,17130) v1(41185.2,17130) v1(41365.2,17130) v1(41545,17130) v1(41725.2,17130) v1(41910.2,17130) v1(42090.2,17130) v1(42270,17130) v1(42450.2,17130) v1(42635.2,17130) v1(42815.2,17130) v1(43000,17130) v1(43180.2,17130) v1(43365.2,17130) v1(43545.2,17130) v1(43725,17130) v1(43905.2,17130) v1(44090.2,17130) v1(44270.2,17130) v1(44450,17130) v1(44630.2,17130) v1(44815.2,17130) v1(44995.2,17130) v1(45175,17130) v1(45355.2,17130) v1(45540.2,17130) v1(45720.2,17130) v1(45900,17130) v1(46080.2,17130) v1(46265.2,17130) v1(46445.2,17130) v1(46625,17130) v1(46805.2,17130) v1(46990.2,17130) v1(47170.2,17130) v1(47350,17130) v1(47530.2,17130) v1(47715.2,17130) v1(47895.2,17130) v1(48075,17130) v1(48255.2,17130) v1(48440.2,17130) v1(48620.2,17130) v1(48805,17130) v1(48985.2,17130) v1(49170.2,17130) v1(49350.2,17130) v1(49530,17130) v1(49710.2,17130) v1(49895.2,17130) v1(50075.2,17130) v1(50255,17130) v1(50435.2,17130) v1(50620.2,17130) v1(50800.2,17130) v1(50980,17130) v1(51160.2,17130) v1(51345.2,17130) v1(51525.2,17130)
AOD13: *1.78 *15.1 | length 30718.2
  Top Layer w30: v1(42445.2,17250) 42500,17304.8 42500,19115.2 v1(42445.2,19170) ; v1(45350.2,17250) 45405,17304.8 45405,19115.2 v1(45350.2,19170) ; v1(48250.2,17250) 48305,17304.8 48305,19115.2 v1(48250.2,19170) ; v1(51155.2,17250) 51205.39,17300.2 51205.39,19119.8 v1(51155.2,19170)
  MidLayer1 w30: v2(40090,17250) v1(40270.2,17250) v1(40455.2,17250) v1(40635.2,17250) v1(40815,17250) v1(40995.2,17250) v1(41180.2,17250) v1(41360.2,17250) v1(41540,17250) v1(41720.2,17250) v1(41905.2,17250) v1(42085.2,17250) v1(42265,17250) v1(42445.2,17250) v1(42630.2,17250) v1(42810.2,17250) v1(42995,17250) v1(43175.2,17250) v1(43360.2,17250) v1(43540.2,17250) v1(43720,17250) v1(43900.2,17250) v1(44085.2,17250) v1(44265.2,17250) v1(44445,17250) v1(44625.2,17250) v1(44810.2,17250) v1(44990.2,17250) v1(45170,17250) v1(45350.2,17250) v1(45535.2,17250) v1(45715.2,17250) v1(45895,17250) v1(46075.2,17250) v1(46260.2,17250) v1(46440.2,17250) v1(46620,17250) v1(46800.2,17250) v1(46985.2,17250) v1(47165.2,17250) v1(47345,17250) v1(47525.2,17250) v1(47710.2,17250) v1(47890.2,17250) v1(48070,17250) v1(48250.2,17250) v1(48435.2,17250) v1(48615.2,17250) v1(48800,17250) v1(48980.2,17250) v1(49165.2,17250) v1(49345.2,17250) v1(49525,17250) v1(49705.2,17250) v1(49890.2,17250) v1(50070.2,17250) v1(50250,17250) v1(50430.2,17250) v1(50615.2,17250) v1(50795.2,17250) v1(50975,17250) v1(51155.2,17250) v1(51340.2,17250) v1(51520.2,17250) ; v1(40090,19170) v1(40270.2,19170) v1(40455.2,19170) v1(40635.2,19170) v1(40815,19170) v1(40995.2,19170) v1(41180.2,19170) v1(41360.2,19170) v1(41540,19170) v1(41720.2,19170) v1(41905.2,19170) v1(42085.2,19170) v1(42265,19170) v1(42445.2,19170) v1(42630.2,19170) v1(42810.2,19170) v1(42995,19170) v1(43175.2,19170) v1(43360.2,19170) v1(43540.2,19170) v1(43720,19170) v1(43900.2,19170) v1(44085.2,19170) v1(44265.2,19170) v1(44445,19170) v1(44625.2,19170) v1(44810.2,19170) v1(44990.2,19170) v1(45170,19170) v1(45350.2,19170) v1(45535.2,19170) v1(45715.2,19170) v1(45895,19170) v1(46075.2,19170) v1(46260.2,19170) v1(46440.2,19170) v1(46620,19170) v1(46800.2,19170) v1(46985.2,19170) v1(47165.2,19170) v1(47345,19170) v1(47525.2,19170) v1(47710.2,19170) v1(47890.2,19170) v1(48070,19170) v1(48250.2,19170) v1(48435.2,19170) v1(48615.2,19170) v1(48800,19170) v1(48980.2,19170) v1(49165.2,19170) v1(49345.2,19170) v1(49525,19170) v1(49705.2,19170) v1(49890.2,19170) v1(50070.2,19170) v1(50250,19170) v1(50430.2,19170) v1(50615.2,19170) v1(50795.2,19170) v1(50975,19170) v1(51155.2,19170) v1(51340.2,19170) v1(51520.2,19170)
AOD14: *1.79 *16.1 | length 30713.4
  Top Layer w30: v1(42630.2,17370) 42680.39,17420.2 42680.39,19239.8 v1(42630.2,19290) ; v1(45535.2,17370) 45589.41,17424.21 45589.41,19235.79 v1(45535.2,19290) ; v1(48435.2,17370) 48489.41,17424.21 48489.41,19235.79 v1(48435.2,19290) ; v1(51340.2,17370) 51390.39,17420.2 51390.39,19239.8 v1(51340.2,19290)
  MidLayer1 w30: v1(40090,17370) v1(40270.2,17370) v1(40455.2,17370) v2(40635.2,17370) v1(40815,17370) v1(40995.2,17370) v1(41180.2,17370) v1(41360.2,17370) v1(41540,17370) v1(41720.2,17370) v1(41905.2,17370) v1(42085.2,17370) v1(42265,17370) v1(42445.2,17370) v1(42630.2,17370) v1(42810.2,17370) v1(42995,17370) v1(43175.2,17370) v1(43360.2,17370) v1(43540.2,17370) v1(43720,17370) v1(43900.2,17370) v1(44085.2,17370) v1(44265.2,17370) v1(44445,17370) v1(44625.2,17370) v1(44810.2,17370) v1(44990.2,17370) v1(45170,17370) v1(45350.2,17370) v1(45535.2,17370) v1(45715.2,17370) v1(45895,17370) v1(46075.2,17370) v1(46260.2,17370) v1(46440.2,17370) v1(46620,17370) v1(46800.2,17370) v1(46985.2,17370) v1(47165.2,17370) v1(47345,17370) v1(47525.2,17370) v1(47710.2,17370) v1(47890.2,17370) v1(48070,17370) v1(48250.2,17370) v1(48435.2,17370) v1(48615.2,17370) v1(48800,17370) v1(48980.2,17370) v1(49165.2,17370) v1(49345.2,17370) v1(49525,17370) v1(49705.2,17370) v1(49890.2,17370) v1(50070.2,17370) v1(50250,17370) v1(50430.2,17370) v1(50615.2,17370) v1(50795.2,17370) v1(50975,17370) v1(51155.2,17370) v1(51340.2,17370) v1(51520.2,17370) ; v1(40090,19290) v1(40270.2,19290) v1(40455.2,19290) v1(40635.2,19290) v1(40815,19290) v1(40995.2,19290) v1(41180.2,19290) v1(41360.2,19290) v1(41540,19290) v1(41720.2,19290) v1(41905.2,19290) v1(42085.2,19290) v1(42265,19290) v1(42445.2,19290) v1(42630.2,19290) v1(42810.2,19290) v1(42995,19290) v1(43175.2,19290) v1(43360.2,19290) v1(43540.2,19290) v1(43720,19290) v1(43900.2,19290) v1(44085.2,19290) v1(44265.2,19290) v1(44445,19290) v1(44625.2,19290) v1(44810.2,19290) v1(44990.2,19290) v1(45170,19290) v1(45350.2,19290) v1(45535.2,19290) v1(45715.2,19290) v1(45895,19290) v1(46075.2,19290) v1(46260.2,19290) v1(46440.2,19290) v1(46620,19290) v1(46800.2,19290) v1(46985.2,19290) v1(47165.2,19290) v1(47345,19290) v1(47525.2,19290) v1(47710.2,19290) v1(47890.2,19290) v1(48070,19290) v1(48250.2,19290) v1(48435.2,19290) v1(48615.2,19290) v1(48800,19290) v1(48980.2,19290) v1(49165.2,19290) v1(49345.2,19290) v1(49525,19290) v1(49705.2,19290) v1(49890.2,19290) v1(50070.2,19290) v1(50250,19290) v1(50430.2,19290) v1(50615.2,19290) v1(50795.2,19290) v1(50975,19290) v1(51155.2,19290) v1(51340.2,19290) v1(51520.2,19290)
AOD15: *1.80 *17.1 | length 30714.4
  Top Layer w30: v1(42810.2,17490) 42865,17544.8 42865,19355.2 v1(42810.2,19410) ; v1(45715.2,17490) 45765.39,17540.2 45765.39,19359.8 v1(45715.2,19410) ; v1(48615.2,17490) 48670,17544.8 48670,19355.2 v1(48615.2,19410) ; v1(51520.2,17490) 51570.39,17540.2 51570.39,19359.8 v1(51520.2,19410)
  MidLayer1 w30: v2(40090,17490) v1(40270.2,17490) v1(40455.2,17490) v1(40635.2,17490) v1(40815,17490) v1(40995.2,17490) v1(41180.2,17490) v1(41360.2,17490) v1(41540,17490) v1(41720.2,17490) v1(41905.2,17490) v1(42085.2,17490) v1(42265,17490) v1(42445.2,17490) v1(42630.2,17490) v1(42810.2,17490) v1(42995,17490) v1(43175.2,17490) v1(43360.2,17490) v1(43540.2,17490) v1(43720,17490) v1(43900.2,17490) v1(44085.2,17490) v1(44265.2,17490) v1(44445,17490) v1(44625.2,17490) v1(44810.2,17490) v1(44990.2,17490) v1(45170,17490) v1(45350.2,17490) v1(45535.2,17490) v1(45715.2,17490) v1(45895,17490) v1(46075.2,17490) v1(46260.2,17490) v1(46440.2,17490) v1(46620,17490) v1(46800.2,17490) v1(46985.2,17490) v1(47165.2,17490) v1(47345,17490) v1(47525.2,17490) v1(47710.2,17490) v1(47890.2,17490) v1(48070,17490) v1(48250.2,17490) v1(48435.2,17490) v1(48615.2,17490) v1(48800,17490) v1(48980.2,17490) v1(49165.2,17490) v1(49345.2,17490) v1(49525,17490) v1(49705.2,17490) v1(49890.2,17490) v1(50070.2,17490) v1(50250,17490) v1(50430.2,17490) v1(50615.2,17490) v1(50795.2,17490) v1(50975,17490) v1(51155.2,17490) v1(51340.2,17490) v1(51520.2,17490) ; v1(40090,19410) v1(40270.2,19410) v1(40455.2,19410) v1(40635.2,19410) v1(40815,19410) v1(40995.2,19410) v1(41180.2,19410) v1(41360.2,19410) v1(41540,19410) v1(41720.2,19410) v1(41905.2,19410) v1(42085.2,19410) v1(42265,19410) v1(42445.2,19410) v1(42630.2,19410) v1(42810.2,19410) v1(42995,19410) v1(43175.2,19410) v1(43360.2,19410) v1(43540.2,19410) v1(43720,19410) v1(43900.2,19410) v1(44085.2,19410) v1(44265.2,19410) v1(44445,19410) v1(44625.2,19410) v1(44810.2,19410) v1(44990.2,19410) v1(45170,19410) v1(45350.2,19410) v1(45535.2,19410) v1(45715.2,19410) v1(45895,19410) v1(46075.2,19410) v1(46260.2,19410) v1(46440.2,19410) v1(46620,19410) v1(46800.2,19410) v1(46985.2,19410) v1(47165.2,19410) v1(47345,19410) v1(47525.2,19410) v1(47710.2,19410) v1(47890.2,19410) v1(48070,19410) v1(48250.2,19410) v1(48435.2,19410) v1(48615.2,19410) v1(48800,19410) v1(48980.2,19410) v1(49165.2,19410) v1(49345.2,19410) v1(49525,19410) v1(49705.2,19410) v1(49890.2,19410) v1(50070.2,19410) v1(50250,19410) v1(50430.2,19410) v1(50615.2,19410) v1(50795.2,19410) v1(50975,19410) v1(51155.2,19410) v1(51340.2,19410) v1(51520.2,19410)
AOG0: 13.2 17.1 58.15 | length 1489.6
  Bottom Layer w10: 17.1@40814.8,15652.6 13.2@40920,15652.6 41272.6,15652.6 41520,15900 41520,16395 41470,16445 58.15@41353.78,16445
AOG1: 14.2 18.1 58.14 | length 1866.9
  Bottom Layer w10: 18.1@40270.2,15772.6 40442.6,15772.6 40475,15805 41340,15805 41495,15960 41495,16375 41475,16395 58.14@41353.78,16395
AOG2: 15.2 19.1 58.13 | length 1156.1
  Bottom Layer w10: 19.1@40815,15892.6 41367.6,15892.6 41475,16000 41475,16320 41450,16345 58.13@41353.78,16345
AOG3: 16.2 20.1 58.12 | length 1517.2
  Bottom Layer w10: 20.1@40270.2,16012.6 41392.6,16012.6 41455,16075 41455,16270 41430,16295 58.12@41353.78,16295
AOG4: 25.2 29.1 58.11 | length 875.3
  Bottom Layer w10: 29.1@40815,16132.6 25.2@40920,16132.6 40992.6,16060 41400,16060 41435,16095 41435,16210 41400,16245 58.11@41353.78,16245
AOG5: 26.2 30.1 58.10 | length 1367.6
  Bottom Layer w10: 26.2@40270.2,16252.6 30.1@40380,16252.6 40402.4,16275 41020,16275 41210,16085 41395,16085 41410,16100 41410,16165 41380,16195 58.10@41353.78,16195
AOG6: 27.2 31.1 58.9 | length 633.1
  Bottom Layer w10: 31.1@40815,16372.6 27.2@40920,16372.6 41032.4,16372.6 41260,16145 58.9@41353.78,16145
AOG7: 28.2 32.1 58.7 | length 1559.5
  Bottom Layer w10: 32.1@40270.2,16492.6 28.2@40380,16492.6 40387.4,16500 41144.61,16500 41176.35,16468.27 41475.02,16468.27 41540,16403.28 41540,16215 41560,16195 58.7@41590,16195
AOG8: 45.2 49.1 59.15 | length 1339.2
  Bottom Layer w10: 49.1@40815,16612.6 41367.6,16612.6 41525,16770 41525,17150 41470,17205 59.15@41363.78,17205
AOG9: 46.2 50.1 59.14 | length 1747.2
  Bottom Layer w10: 50.1@40270.2,16732.6 41447.6,16732.6 41505,16790 41505,17125 41475,17155 59.14@41363.78,17155
AOG10: 47.2 51.1 59.13 | length 1088.2
  Bottom Layer w10: 51.1@40815,16852.6 47.2@40920,16852.6 40982.6,16790 41440,16790 41485,16835 41485,17075 41455,17105 59.13@41363.78,17105
AOG11: 48.2 52.1 59.12 | length 1546.5
  Bottom Layer w10: 48.2@40269.8,16972.6 40987.4,16972.6 41135,16825 41420,16825 41465,16870 41465,17030 41440,17055 59.12@41363.78,17055
AOG12: 59.11 60.2 64.1 | length 923.6
  Bottom Layer w10: 60.2@40820,17092.6 40982.4,17092.6 41225,16850 41415,16850 41445,16880 41445,16970 41410,17005 59.11@41363.78,17005
AOG13: 59.10 61.2 65.1 | length 1478.4
  Bottom Layer w10: 61.2@40270.2,17212.6 65.1@40370,17212.6 40387.4,17230 40985,17230 41050,17165 41050,17075 41250,16875 41405,16875 41420,16890 41420,16945 41410,16955 59.10@41363.78,16955